# Altium PCB Piezoelectric Energy Harvester.PcbDoc
Units mil, origin at the board's own origin, x right, y up, seen from the top; angles counter-clockwise.
Board outline 2519.68 x 1181.1 mil, 2 copper layers (Top Layer, Bottom Layer); 9 components, 9 nets, 33 pads, 54 vias.
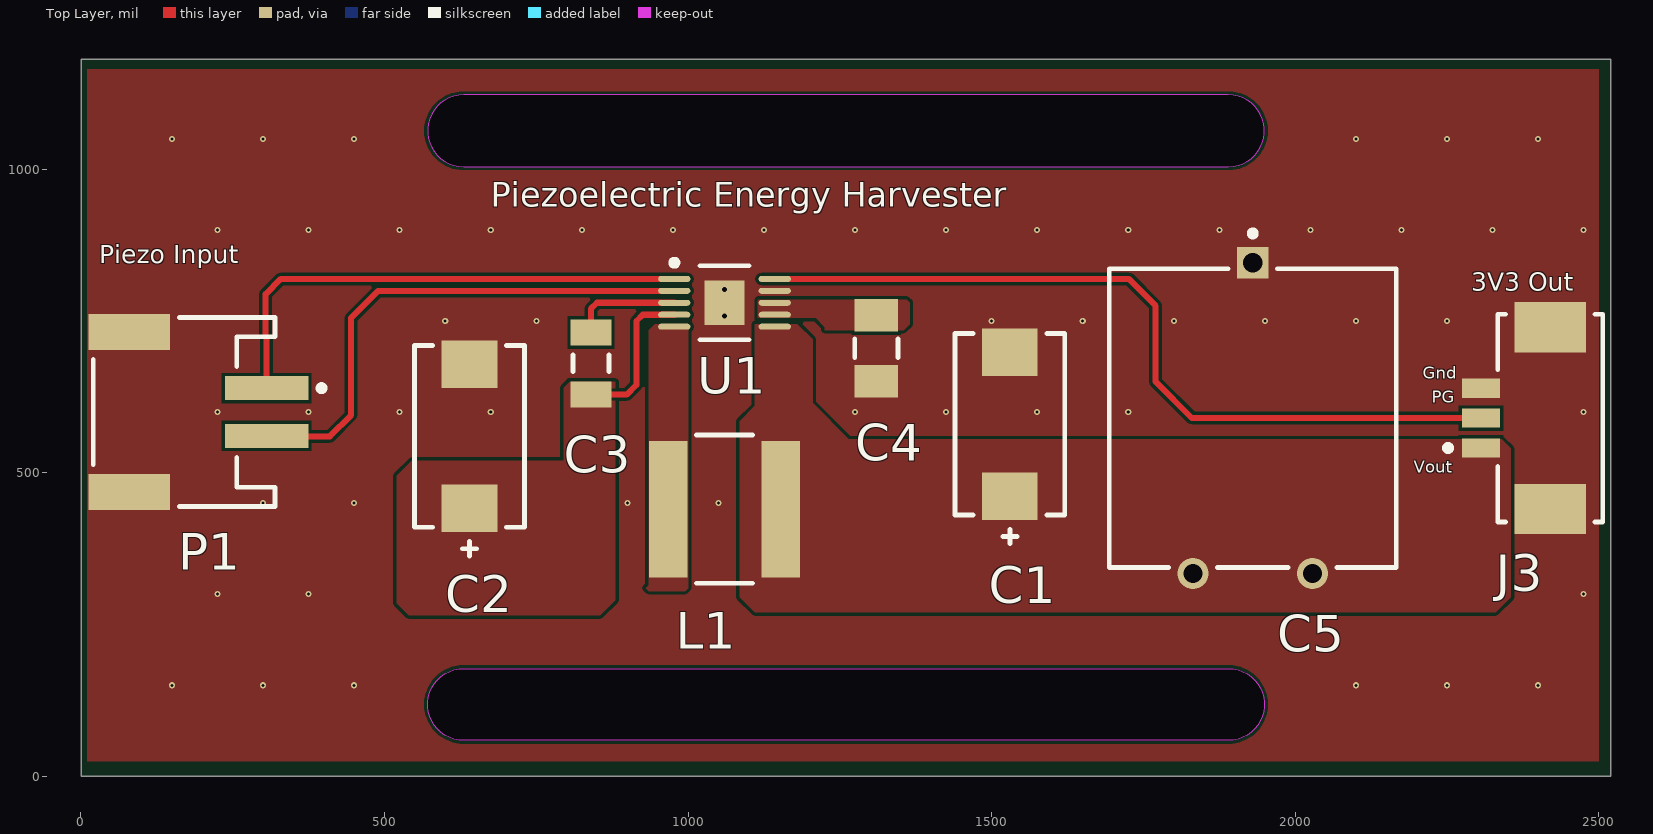
[diagram p0: Top Layer view]
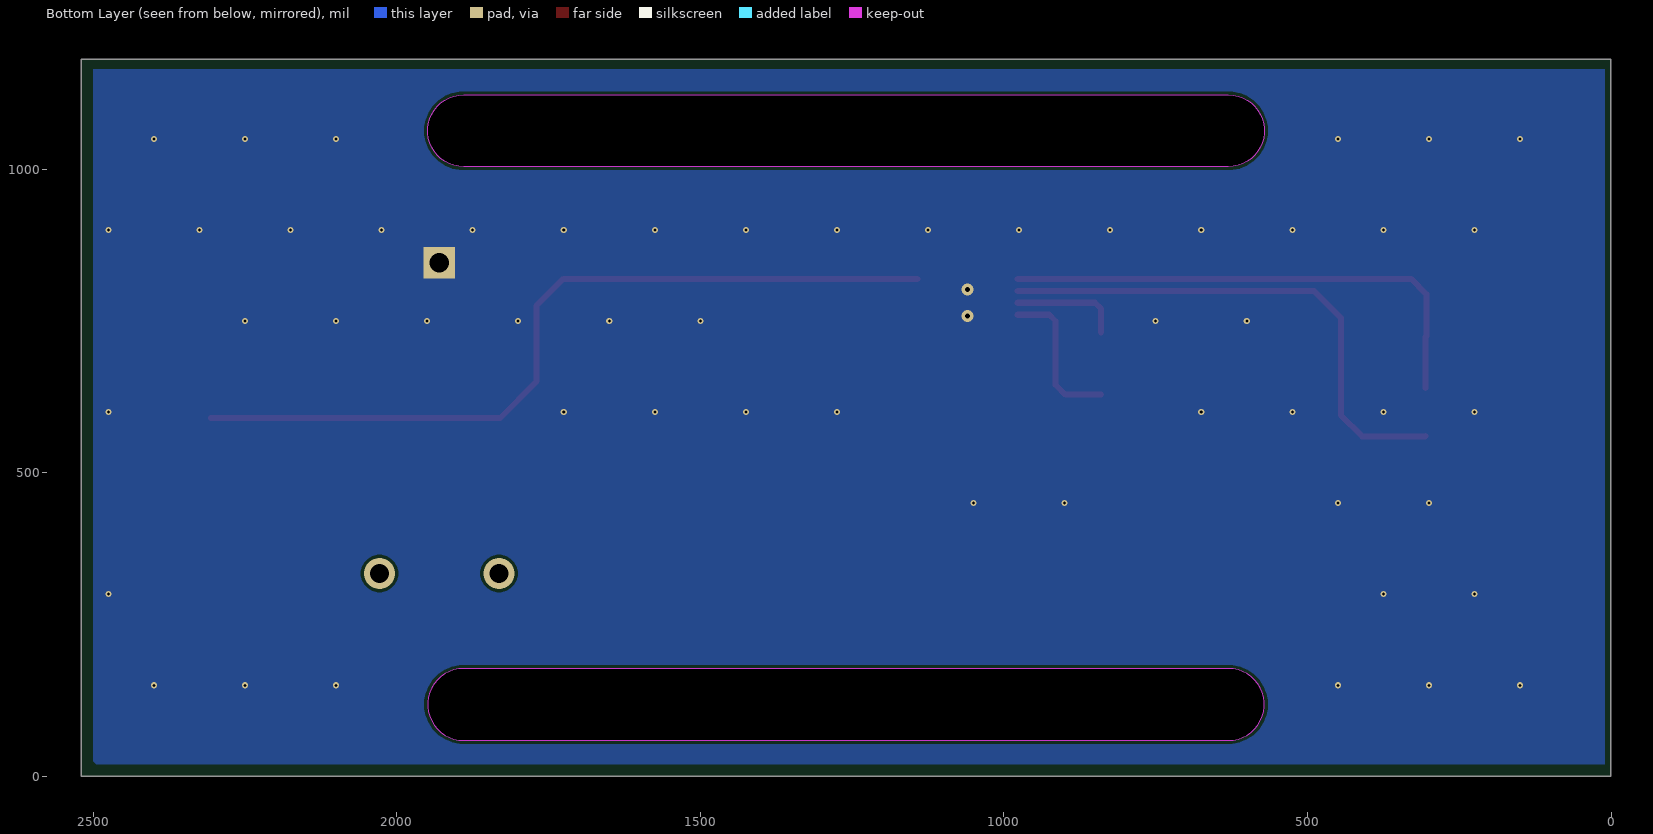
[diagram p1: Bottom Layer view, seen from below]
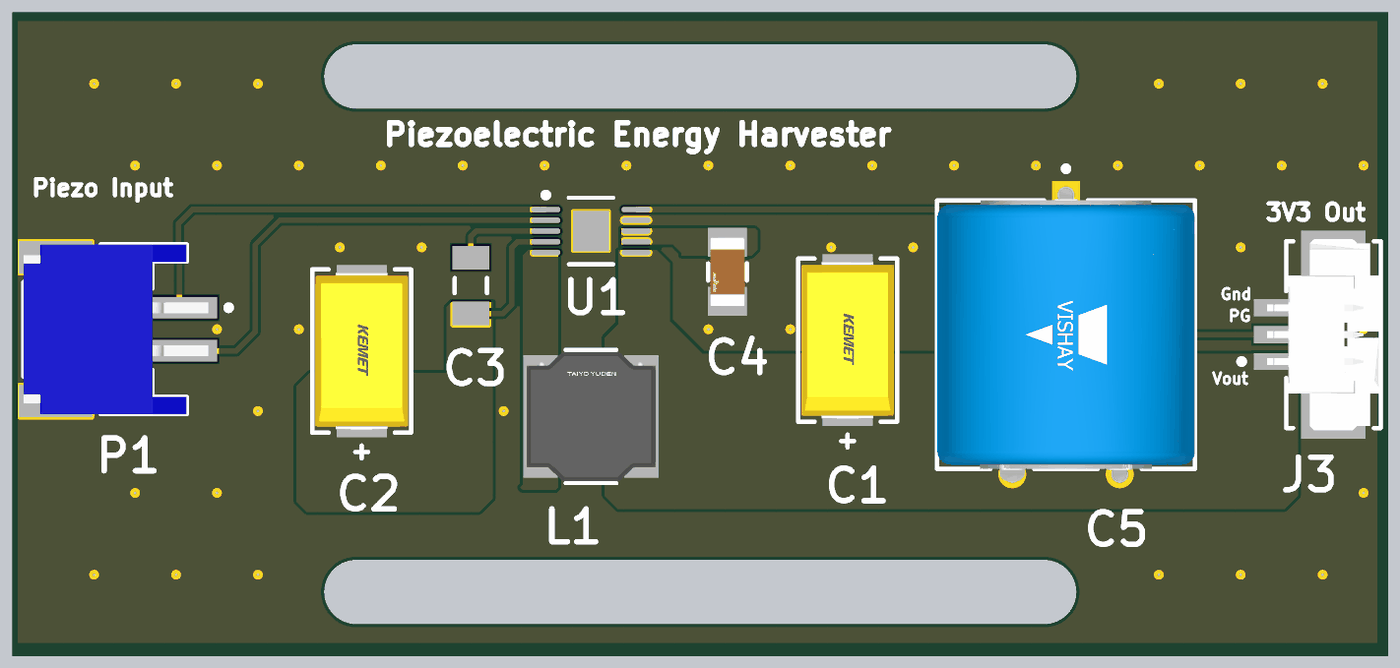
[diagram p2: 3D render of the assembled board from above, using the file's embedded part models]

## Layer stack, top to bottom
Top Solder: solder mask 0.4, Solder Resist, Dk 3.5
Top Layer: signal copper 1.4
Dielectric 1: dielectric 12.6, FR-4, Dk 4.8
Bottom Layer: signal copper 1.4
Bottom Solder: solder mask 0.4, Solder Resist, Dk 3.5

## Board outline
0.25,0.25 0.25,1181.35 2519.93,1181.35 2519.93,0.25
cut-out: 630.17,59.3 cw(c630.17,118.36) 630.17,177.42 1890.01,177.42 cw(c1890.01,118.36) 1890.01,59.3
cut-out: 630.17,1004.19 1890.01,1004.19 ccw(c1890.01,1063.24) 1890.01,1122.3 630.17,1122.3 ccw(c630.17,1063.24)

## Design rules (kind name [scope] priority, off if disabled: settings)
Clearance [All] p1: gap=5 ignorepadtopadclearanceinfootprint=FALSE
PlaneClearance [All] p1: clearance=5
PlaneConnect [All] p1: planeconnectstyle=Direct reliefexpansion=20 reliefentries=4 reliefconductorwidth=10 reliefairgap=10
PolygonConnect [All] p1: connectstyle=Direct reliefconductorwidth=10 reliefentries=4 polygonreliefangle="90 Angle" airgapwidth=10
RoutingVias [All] p1: holewidth=28 width=50 viastyle="Through Hole" minholewidth=28 minwidth=50 maxholewidth=28 maxwidth=50
SolderMaskExpansion [All] p1: expansion=4 istentingtop=FALSE
Width [All] p1: maxlimit=10 minlimit=10 preferedwidth=10
28 further rules are at their usual default settings.

## Components (designator, comment, footprint, x,y, rotation, side; value= is the part's Value field where it differs from the comment)
C1 "47uF" FP-T491D476K025AT-MFG 1530,580 r270 top
C2 "10uF" FP-T491D-MFG 640,560 r270 top
C3 "1uF" CAPC3216X110X50LL20T25 840,680 r270 top
C4 "4.7uF" FP-GRM31C-0_2-e0_3_0_8-IPC_B 1310,705 r270 top
C5 "MAL219691215E3" FP-MAL219691215E3-MFG 1930,590 r270 top
J3 "53261-0371" FP-53261-0371-MFG 2420,590 r90 top
L1 "10uH" FP-NR6045-MFG 1060,440 r0 top
P1 "S2B-PH-SM4-TB(LF)(SN)" "JST- S2B-PH-SM4-TB(LF)(SN)-2_V" 170,600 r270 top
U1 "LTC3588IMSE-1#TRPBF" LT-MSE-10-EDP_L 1060,780 r0 top

## Footprints (in the part's own frame and the unit in brackets; to place one, negate y for a bottom-side part, rotate by r counter-clockwise, add the part's x,y. Pads: shape width x height; smd on the part's side, far side on the other; paste and mask are expansions set on the pad)
CAPC3216X110X50LL20T25 [mm] "Chip Capacitor, 2-Leads, Body 3.20x1.60mm, IPC High Density"
  rect 1.1x1.7 smd: 1(-1.3,0) 2(1.3,0)
  silkscreen extent -0.35,-0.75 0.35,0.75, body extent -1.7,-0.9 1.7,0.9, height 1.1
FP-53261-0371-MFG [mm]
  rect 0.8x1.6 smd paste+0 mask+0: 1(-1.25,2.9) 2(0,2.9) 3(1.25,2.9)
  rect 2.1x3 smd paste+0 mask+0: 4(-3.8,0) 5(3.8,0)
  silkscreen extent -4.35,-2.2 4.35,4.4, body extent -4.95,-2.3 4.95,3.8, height 0.25
FP-GRM31C-0_2-e0_3_0_8-IPC_B [mil]
  rect 53.33x71.11 smd paste+0 mask+0: 1(-54.16,0) 2(54.16,0)
  silkscreen extent -16,-36 16,36, body extent -91,-45 91,45, height 10
FP-MAL219691215E3-MFG [mm]
  rect 1.3x1.3 hole 0.8 paste-1000 mask+0: 1(-6.5,0)
  round 1.3 hole 0.8 paste-1000 mask+0: 2(6.5,2.5) 3(6.5,-2.5)
  silkscreen extent -7.85,-6 6.25,6, body extent -7.25,-6.1 7.25,6.1, height 0.25
FP-NR6045-MFG [mm]
  rect 1.6x5.7 smd paste+0 mask+0: 1(-2.35,0) 2(2.35,0)
  silkscreen extent -1.17,-3.1 1.17,3.1, body extent -3.25,-3.2 3.25,3.2, height 0.25
FP-T491D476K025AT-MFG [mm]
  rect 1.99x2.33 smd paste+0 mask+0: 1(-3.01,0) 2(3.01,0)
  silkscreen extent -3.8,-2.3 5,2.3, body extent -4.13,-2.42 4.13,2.42, height 0.25
FP-T491D-MFG [mm]
  rect 1.99x2.33 smd paste+0 mask+0: 1(-3.01,0) 2(3.01,0)
  silkscreen extent -3.8,-2.3 5,2.3, body extent -4.13,-2.42 4.13,2.42, height 0.25
"JST- S2B-PH-SM4-TB(LF)(SN)-2_V" [mm] "SMD, 2-Leads, Body 7.9x7.6mm, Pitch 2mm"
  rect 1x3.5 smd: 1(-1,3.45) 2(1,3.45)
  rect 1.5x3.4 smd: MP1(-3.35,-2.3) MP2(3.35,-2.3)
  silkscreen extent -3.95,-3.8 3.95,5.88, body extent -3.95,-3.8 3.95,4.8, height 5.6
LT-MSE-10-EDP_L [mm] "SOP, 10-Leads, Body 3.1x3.1mm, Pitch 0.5mm, Thermal Pad 1.88x1.68mm, IPC High Density"
  oval 1.35x0.25 smd mask+0.082: 1(-2.1,1) 2(-2.1,0.5) 3(-2.1,0) 4(-2.1,-0.5) 5(-2.1,-1) 6(2.1,-1) 7(2.1,-0.5) 8(2.1,0) 9(2.1,0.5) 10(2.1,1)
  rect 1.68x1.88 smd mask+0.082: 11(0,0)
  silkscreen extent -2.22,-1.55 1.02,1.8, body extent -1.55,-1.55 1.55,1.55, height 1.1

## Part data
C1: library part CMP-03017-000020-1, "CAP TANT 47UF 10% 25V 2917", Case Code (Imperial)=2917, Case Code (Metric)=7343, Dielectric Material=Tantalum, ESR (Equivalent Series Resistance)=700mR, Leakage Current=11.8uA, Max Operating Temperature=125°C, Min Operating Temperature=-55°C, Package Quantity=1, Ripple Current=463mA, Tolerance=10%, Voltage=25V, Capacitance=47uF, Case/Package=2917, Depth=4.3mm, Dissipation Factor=10%, Failure Rate=0.001%, Features="General Purpose", Height=2.8mm, Height - Seated (Max)=0.122inch, Lead Free="Lead Free", Length=7.3mm, Life (Hours)=2000Hour, Mount="Surface Mount", Number of Pins=2, Packaging="Tape and Reel", Polarity=Polar, Radiation Hardening=No, REACH SVHC="No SVHC", RoHS Compliant=Yes, Termination=SMD/SMT, Voltage Rating=25V, Voltage Rating (DC)=25V, Weight=0.023634oz, Width=4.3mm
C2: library part CMP-2000-07200-2, "CAP TANT 10UF 10% 25V 2917", Case Code (Imperial)=2917, Case Code (Metric)=7343, Dielectric Material=Tantalum, ESR (Equivalent Series Resistance)=1R, Leakage Current=2.5uA, Max Operating Temperature=125°C, Min Operating Temperature=-55°C, Package Quantity=1, Ripple Current=387mA, Tolerance=20%, Voltage=25V, Capacitance=10uF, Case/Package=2917, Depth=4.3mm, Dissipation Factor=6%, Features="General Purpose", Height=2.8mm, Height - Seated (Max)=0.122inch, Lead Free="Lead Free", Length=7.3mm, Life (Hours)=2000Hour, Mount="Surface Mount", Number of Pins=2, Packaging="Tape and Reel", Polarity=Polar, Radiation Hardening=No, REACH SVHC="No SVHC", Termination=SMD/SMT, Voltage Rating=25V, Voltage Rating (DC)=25V, Width=4.3mm
C3: library part CMP-2000-06011-1, "Chip Capacitor, 1 uF, +/- 10%, 50 V, -55 to 125 degC, 1206 (3216 Metric), RoHS, Tape and Reel", Capacitance - nF=1000nF, Case Code - in=1206, Case Code - mm=3216, Case Height=1mm, Case Length=3.2mm, Case Width=1.6mm, Dielectric=X7R, Manufacturer=Kemet, Maximum Operating Temperature=+125C, Minimum Operating Temperature=-55C, Operating Temperature Range=-55Cto+125C, Package / Case=1206(3216metric), Package Description="2-Pin Surface Mount Device, Body 3.2 x 1.6 mm", Temperature Coefficient / Code=+/-15%, Tolerance=10%, Voltage Rating=50V, Brand=Kemet, Capacitance=1uF, Class=Class1, Datasheet URL=http://www.kemet.com/docfinder?Partnumber=C1206C105K5RACTU, Datasheet Version=02/2016, Dimensions=1.6mmWx3.2mmLx1mmH, Factory Pack Quantity=2500, Manufacturer URL=http://www.kemet.com/, Mounting Technology=SurfaceMount, Package Reference=1206, Packaging=Reel, Product=GeneralTypeMLCCs, Product Category=MultilayerCeramicCapacitorsMLCC-SMD/SMT, RoHS=Details, Series=C1206C, Termination Style=SMD/SMT, Type=SMDMLCCX7R6.3-250VDCCommericalGrade, Voltage Rating DC=50V
C4: library part CMP-1037-04923-3, "Chip Multilayer Ceramic Capacitors for General Purpose, 1206, 4.7uF, X7R, 15%, 10%, 50V", Case Code (Imperial)=1206, Case Code (Metric)=3216, Dielectric=X7R, Max Operating Temperature=125°C, Min Operating Temperature=-55°C, Package Quantity=2000, Tolerance=10%, Voltage=50V, Capacitance=4.7uF, Case/Package=1206, Depth=1.6mm, Height=1.6mm, Lead Free="Lead Free", Length=3.2mm, Material=Ceramic, Mount="Surface Mount", Packaging="Tape and Reel", Radiation Hardening=No, REACH SVHC="No SVHC", Termination=SMD/SMT, Thickness=0.071inch, Voltage Rating=50V, Voltage Rating (DC)=50V, Width=0.063inch
C5: library part CMP-02421-000004-1, "CAP 15F -20% +80% 7V T/H", Capacitance=15F, Case/Package=B, ESR (Equivalent Series Resistance)=12.5R, Leakage Current=120uA, Max Operating Temperature=85°C, Min Operating Temperature=-20°C, Package Quantity=40, Tolerance=80%, Voltage=7V, Diameter=12mm, Height=12.5mm, Lead Diameter=0.64mm, Lead Pitch=0.512inch, Length=0.492inch, Life (Hours)=1000Hour, Mount="Through Hole", Orientation=Horizontal, Packaging=Tray, RoHS Compliant=Yes, Series="196 HVC", Termination="Through Hole", Voltage Rating=7V, Voltage Rating (DC)=7V
J3: library part CMP-04776-000071-1, "CONN HEADER SMD R/A 3POS 1.25MM", Ambient Temperature Range High=+105°C, Ambient Temperature Range Low=-40°C, Current Rating=1A, Manufacturer=Molex, Package=0, Temperature="-40°C to +105°C", Voltage Rating=125V, Automotive=No, Category=Conn, ComponentLink2Description=Datasheet, ComponentLink2URL=https://www.molex.com/webdocs/datasheets/pdf/en-us/0532610371_PCB_HEADERS.pdf, Conn Gender=Male, Conn Orientation="Right Angle", Contact Material=Tin,Nickel, Device Class L1=Connectors, Device Class L2="Headers and Wire Housings", Device Class L3=unset, Digikey Description="CONN HEADER SMD R/A 3POS 1.25MM", Footprint Url=https://www.molex.com/pdm_docs/sd/532610371_sd.pdf, Height=3.6mm, Lead Free=Yes, Manufacturer Part Number=53261-0371, Mouser Description="1.25mm (.049\") Pitch PicoBlade Header, Surface Mount, Right Angle, Lead-free, 3 Circuits", Number of Contacts=3, Number of Rows=1, Octopart=https://octopart.com/53261-0371-molex-655314, Pitch=1.25mm, RoHS=TRUE, Temperature Range High=+105°C, Temperature Range Low=-40°C
L1: library part CMP-14484-001000-1, "Shielded Wirewound Inductor 10uH 20% 2.5A 61.1mΩ SMD", Case/Package=2424, Current Rating=2.5A, DC Resistance (DCR)=61.1mR, Inductance Tolerance=20%, Max Operating Temperature=120°C, Min Operating Temperature=-25°C, Package Quantity=1500, Resistor Type=Wirewound, Saturation Current=3A, Self Resonant Frequency=12MHz, Test Frequency=100kHz, Core Material=Ferrite, Halogen Free="Halogen Free", Height=4.5mm, Height - Seated (Max)=0.177inch, Inductance=10uH, Length=0.236inch, Max DC Current=2.5A, Mount="Surface Mount", Number of Pins=2, Packaging="Tape and Reel", RMS Current (Irms)=2.5A, RoHS Compliant=Yes, Series=NR, Shielding=Shielded, Termination=SMD/SMT, Tolerance=20%, Width=6mm
P1: library part CMP-1755-00001-1, "Male Header, Pitch 2 mm, 1 x 2 Position, Height 5.5 mm, -25 to 85 degC, RoHS, Tape and Reel", Colour=Black, Current Rating="3 A", Max Operating Temperature=105degC, Min Operating Temperature=-65degC, Package Quantity=100, ComponentLink1Description="Manufacturer URL", ComponentLink1URL=http://www.jst.com/home2.html, ComponentLink2Description=Datasheet, ComponentLink2URL=http://www.jst-mfg.com/product/pdf/eng/ePH.pdf, Contact Finish=Lead, Contact Material=Bronze, Contact Plating=Tin, DatasheetVersion=Dec-12, Height="8.13 mm", Lead Pitch="0.1 inch", Length="101.19 mm", Mount="Through Hole", PackageDescription="Male Header, Pitch 2 mm, 1 x 2 Position, Height 5.5 mm", PackageReference=S2B-PH-SM4-TB(LF)(SN)-2, Packaging=Bulk, Pins=40, Radiation Hardening=No, RoHSCompliant=True, Width="2.34 mm"
U1: library part CMP-0473-00114-1, "Piezoelectric Energy Harvesting Power Supply, 10-pin SOP (MSE-10), -40 to 125 degC, Pb-Free, Tape and Reel", Manufacturer="Linear Technology", ComponentLink1Description="Manufacturer URL", ComponentLink1URL=http://www.linear.com/, ComponentLink2Description=Datasheet, ComponentLink2URL=http://cds.linear.com/docs/en/datasheet/35881fa.pdf, ComponentLink3Description="Package Specification", ComponentLink3URL=http://cds.linear.com/docs/en/packaging/05081664_I_MSE.pdf, DatasheetVersion="Rev. A", Energy Source=Piezoelectric, Mounting Technology="Surface Mount", Number of Outputs=1, PackageDescription="10-Pin Plastic MSOP, Exposed Die Pad, Body 3 x 3 mm, Pitch 0.5 mm", PackageReference=MSE-10, PackageVersion="Rev. I, 05/2013", Packing="Tape and Reel", PartNumber=LTC3588IMSE-1#TRPBF, RoHS=TRUE, Topology=Buck, Vin Max(V)=20, Vin Min(V)=2.7, Vout Max(V)="1.8, 2.5, 3.3, 3.6"

## Via types
v1: diameter 10, hole 5, Top Layer to Bottom Layer, 52 vias
v2: diameter 19.68, hole 7.87, Top Layer to Bottom Layer, 2 vias

## Nets (pads, with @x,y where several pads share a name; then routed paths per layer and width w, separated by ;. In a path a pad name is that pad's centre, name@x,y a point inside that pad or via, vN(x,y) a via of type N, cw(c..) or ccw(c..) an arc to the next point about the centre after c; other vN are vias at no path point)
CAP: C3.1 U1.3 | length 180.3
  Top Layer w10: C3.1 840,770 850,780 U1.3
GND: C1.1 C2.1 C4.2 C5.1 J3.3 J3.4 J3.5 P1.MP1 P1.MP2 U1.9 U1.11
  other v1: 150,150 300,150 450,150 2100,150 2250,150 2400,150 225,300 375,300 2475,300 300,450 450,450 900,450 1050,450 225,600 375,600 525,600 675,600 1275,600 1425,600 1575,600 1725,600 2475,600 600,750 750,750 1500,750 1650,750 1800,750 1950,750 2100,750 2250,750 225,900 375,900 525,900 675,900 825,900 975,900 1125,900 1275,900 1425,900 1575,900 1725,900 1875,900 2025,900 2175,900 2325,900 2475,900 150,1050 300,1050 450,1050 2100,1050 2250,1050 2400,1050
  other v2: 1060,758.35 1060,801.65
PowerGood: J3.2 U1.10 | length 1331.4
  Top Layer w10: U1.10 1725.63,819.37 1770,775 1770,650 1830,590 J3.2
PZ1: P1.1 U1.1 | length 839.1
  Top Layer w10: P1.1 305.83,723.26 304.14,724.94 304.14,794.14 329.37,819.37 U1.1
PZ2: P1.2 U1.2 | length 864.8
  Top Layer w10: P1.2 306.46,560 410,560 445,595 445,755 489.69,799.69 U1.2
SW: L1.1 U1.5
VIN: C2.2 C3.2 U1.4 | length 253.3
  Top Layer w10: C3.2 898.82,628.82 915,645 915,750 925.32,760.32 U1.4
VIN2: C4.1 U1.7 U1.8
VOUT: C1.2 C5.2 C5.3 J3.1 L1.2 U1.6

## Polygon pours and split planes (outlines as drawn)
GND on Top Layer "GND_L01_P004" (solid, pour order 4): 10,1165 2500,1165 2500,25 10,25
VIN on Top Layer "VIN_L01_P003" (solid, pour order 3): 805,650 795,640 795,520 545,520 520,495 520,285 540,265 855,265 880,290 880,650 825,650
VOUT on Top Layer "VOUT_L01_P002" (solid, pour order 2): 1135,745 1180,745 1205,720 1205,615 1265,555 2340,555 2355,540 2355,295 2330,270 1110,270 1085,295 1085,585 1110,610 1110,745 1138.31,745 1142.68,740.63
VIN2 on Top Layer "VIN2_L01_P001" (solid, pour order 1): 1360,785 1365,780 1365,745 1355,735 1225,735 1225,740 1210,755 1115,755 1115,785
SW on Top Layer "SW_L01_P000" (solid, pour order 0): 1000,745 1000,310 995,305 935,305 930,310 935,315 935,735 945,745 960,745
GND on Bottom Layer "GND_L02_P005" (solid, pour order 5): 10,1165 2500,1165 2500,25 2495,20 10,20

## Silkscreen, mask and mechanical layers (free items; w line width, h text height)
Top Overlay:
  text "Piezoelectric Energy Harvester" at 675,938.33 h40
  text "Piezo Input" at 30,845 h30
  text "3V3 Out" at 2290,800 h30
  text "Gnd" at 2210,655 h20
  text "PG" at 2225,615 h20
  text "Vout" at 2195,500 h20
Mechanical 1:
  lines w0.5: 0.25,0.25 0.25,1181.35 2519.93,1181.35 2519.93,0.25 0.25,0.25 ; 630.17,59.31 cw(c630.17,118.36) 630.17,177.42 1890.01,177.42 cw(c1890.01,118.36) 1890.01,59.31 630.17,59.31 ; 630.17,1004.19 cw(c630.17,1063.24) 630.17,1122.3 1890.01,1122.3 cw(c1890.01,1063.24) 1890.01,1004.19 630.17,1004.19